# EAGLE board attiny_rc_switch_board (EAGLE 9.7.0)
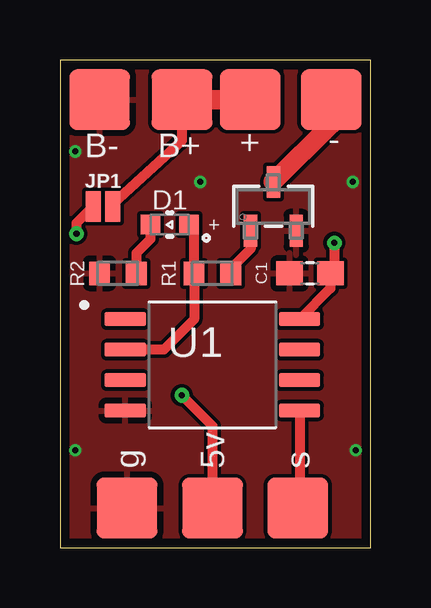
[diagram p0: board, top side]
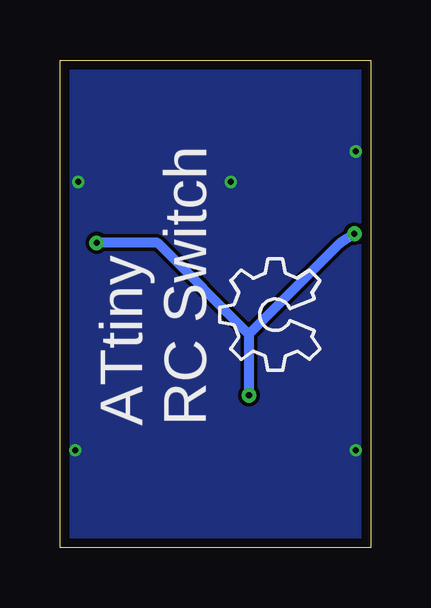
[diagram p1: board, bottom side, seen from below]

Size 12.95 x 20.32 mm. Coordinates in mm from the lower left corner, seen from the top.
Outline: 0,0 12.95,0 12.95,20.32 0,20.32 0,0
Copper layers (1*16): Top 0.035559375mm / dielectric 1.6mm / Bottom 0.035559375mm
Design rules "oshpark-2layer.dru *": minimum track width 6mil, minimum drill 10mil, track to track 6mil, track to pad 6mil, pad to pad 6mil, via to via 6mil, smd to smd 6mil, copper to edge 15mil, drill to drill 6mil, minimum pad ring 5mil, minimum via ring 5mil, stop-mask expansion 2.5mil, vias tented up to drill 0mil, thermal gap 10mil

## Footprints (pad centres in the part's own frame; a part is rotated, then mirrored left to right if it is on the bottom)
CC0603ZRY5V9BB = smd 1.1 x 1: 1 -0.85,0; 2 0.85,0
LED_0603_WL-SMCW = smd 0.8 x 0.8: 1 -0.8,0; 2 0.8,0
SMT-JUMPER_2_NO_NO-SILK = smd 0.635 x 1.27: 1 -0.406,0; 2 0.406,0
RCS0603 = smd 0.86 x 0.98: 1 -0.765,0; 2 0.765,0
ATTINY85-20SU = smd 1.71 x 0.58: 1 -3.63,1.905; 2 -3.63,0.635; 3 -3.63,-0.635; 4 -3.63,-1.905; 5 3.63,-1.905; 6 3.63,-0.635; 7 3.63,0.635; 8 3.63,1.905
MOSFET_N-CH_IRLML2502TRPBF = smd 0.559 x 1.321: 1 -0.953,-1.016; 2 0.953,-1.016; 3 0,1.016
SMD_PAD_NO_STENCIL = smd 2.54 x 2.54: P$1 0,0

## Placement (x,y rotation side)
C1  0.1uF  [CC0603ZRY5V9BB]  10.41,11.43 180 top
D1  LED_0603_WL-SMCW  [LED_0603_WL-SMCW]  4.57,13.46 0 top
JP1  JUMPER-SMT_2_NO_NO-SILK  [SMT-JUMPER_2_NO_NO-SILK]  1.79,14.22 0 top
R1  470  [RCS0603]  6.35,11.43 0 top
R2  470  [RCS0603]  2.41,11.43 0 top
U1  ATTINY85-20SU  [ATTINY85-20SU]  6.35,7.62 0 top
U2  MOSFET_N-CH_IRLML2502TRPBFPG-TO23-3_INF  [MOSFET_N-CH_IRLML2502TRPBF]  8.89,14.22 0 top
U$1  SMD_PAD_NO_STENCIL  [SMD_PAD_NO_STENCIL]  9.91,1.65 0 top
U$2  SMD_PAD_NO_STENCIL  [SMD_PAD_NO_STENCIL]  6.35,1.65 0 top
U$3  SMD_PAD_NO_STENCIL  [SMD_PAD_NO_STENCIL]  11.3,18.67 0 top
U$4  SMD_PAD_NO_STENCIL  [SMD_PAD_NO_STENCIL]  7.92,18.67 0 top
U$5  SMD_PAD_NO_STENCIL  [SMD_PAD_NO_STENCIL]  5.08,18.67 0 top
U$6  SMD_PAD_NO_STENCIL  [SMD_PAD_NO_STENCIL]  1.65,18.67 0 top
U$7  SMD_PAD_NO_STENCIL  [SMD_PAD_NO_STENCIL]  2.79,1.65 0 top

## Library data of the parts
C1 D1 R1 R2 U$1-U$7 = scotts-library
JP1 = SparkFun-Jumpers
U1 = scotts-library; AVAILABILITY: Good; DESCRIPTION: IC MCU 8BIT 8KB FLASH 8SOIC; MAXIMUM_PACKAGE_HEIGHT: 2.16 mm; MF: Microchip Technology; MP: ATTINY85V-10SU; PACKAGE: None; PARTREV: 2586Q–AVR–08/2013; PRICE: None; PURCHASE-URL: https://pricing.snapeda.com/search/part/ATTINY85V-10SU/?ref=eda
U2 = scotts-library; COPYRIGHT: Copyright (C) 2024 Ultra Librarian. All rights reserved.; MANUFACTURER_PART_NUMBER: IRLML2502TRPBF; MFR_NAME: Infineon

## Nets
5V: C1.1 JP1.1 U1.8 U$2.P$1
GND: C1.2 R2.1 U1.4 U2.2 U$6.P$1 U$7.P$1
N$1: D1.2 R1.1 U1.2
N$2: R1.2 U2.1
N$3: D1.1 R2.2
OUT+: JP1.2 U$4.P$1 U$5.P$1
OUT-: U2.3 U$3.P$1
PB1: U1.6
PB2: U1.7
PB4: U1.3
PB5: U1.1
SIG: U1.5 U$1.P$1

## Tracks (layer width: path | path; a pad name or v marks a point on that pad's centre or on a via)
5V  (via drill 0.25 pad 0.61)
  Top 0.406: v11.43,12.7 11.43,11.43 C1.1 11.26,10.81 U1.8 | U$2.P$1 6.35,5.08 v5.08,6.35 | JP1.1 0.69,13.53 v0.69,13.08
  Bottom 0.406: 5.08,8.89 8.89,12.7 v11.43,12.7 | 5.08,8.89 v5.08,6.35 | 5.08,8.89 1.27,12.7 v0.69,13.08
GND  (via drill 0.25)
  other vias: 5.84,15.24 12.32,4.06 0.64,4.06 0.64,16.51 12.19,15.24
  pour Top: 0.08,0.08 13.13,0.08 13.13,20.24 0.08,20.24
  pour Bottom: 0.08,0.08 13.13,0.08 13.13,20.24 0.08,20.24
N$1
  Top 0.406: D1.2 5.58,13.25 R1.1 5.58,9.52 4.33,8.26 U1.2
N$2
  Top 0.406: U2.1 7.94,12.45 7.12,11.62 R1.2
N$3
  Top 0.406: R2.2 3.18,12.28 3.77,12.87 D1.1
OUT+
  Top 0.406: JP1.2 2.2,14.34 5.08,16.96 U$5.P$1
  Top 0.813: U$5.P$1 U$4.P$1
OUT-
  Top 0.813: U2.3 11.3,17.65 U$3.P$1
SIG
  Top 0.406: U1.5 9.98,1.57 U$1.P$1

## Text on the board
tPlace: - | B- | B+ | + | g | 5v | s
bPlace: ATtiny / RC Switch